# Altium PCB RF315.PcbDoc (part 3 of 3)
Units mm, origin at the board's own origin, x right, y up, seen from the top; angles counter-clockwise.
Board outline 104 x 96 mm, 2 copper layers (Top Layer, Bottom Layer); 249 components, 20 nets, 1048 pads, 153 vias.
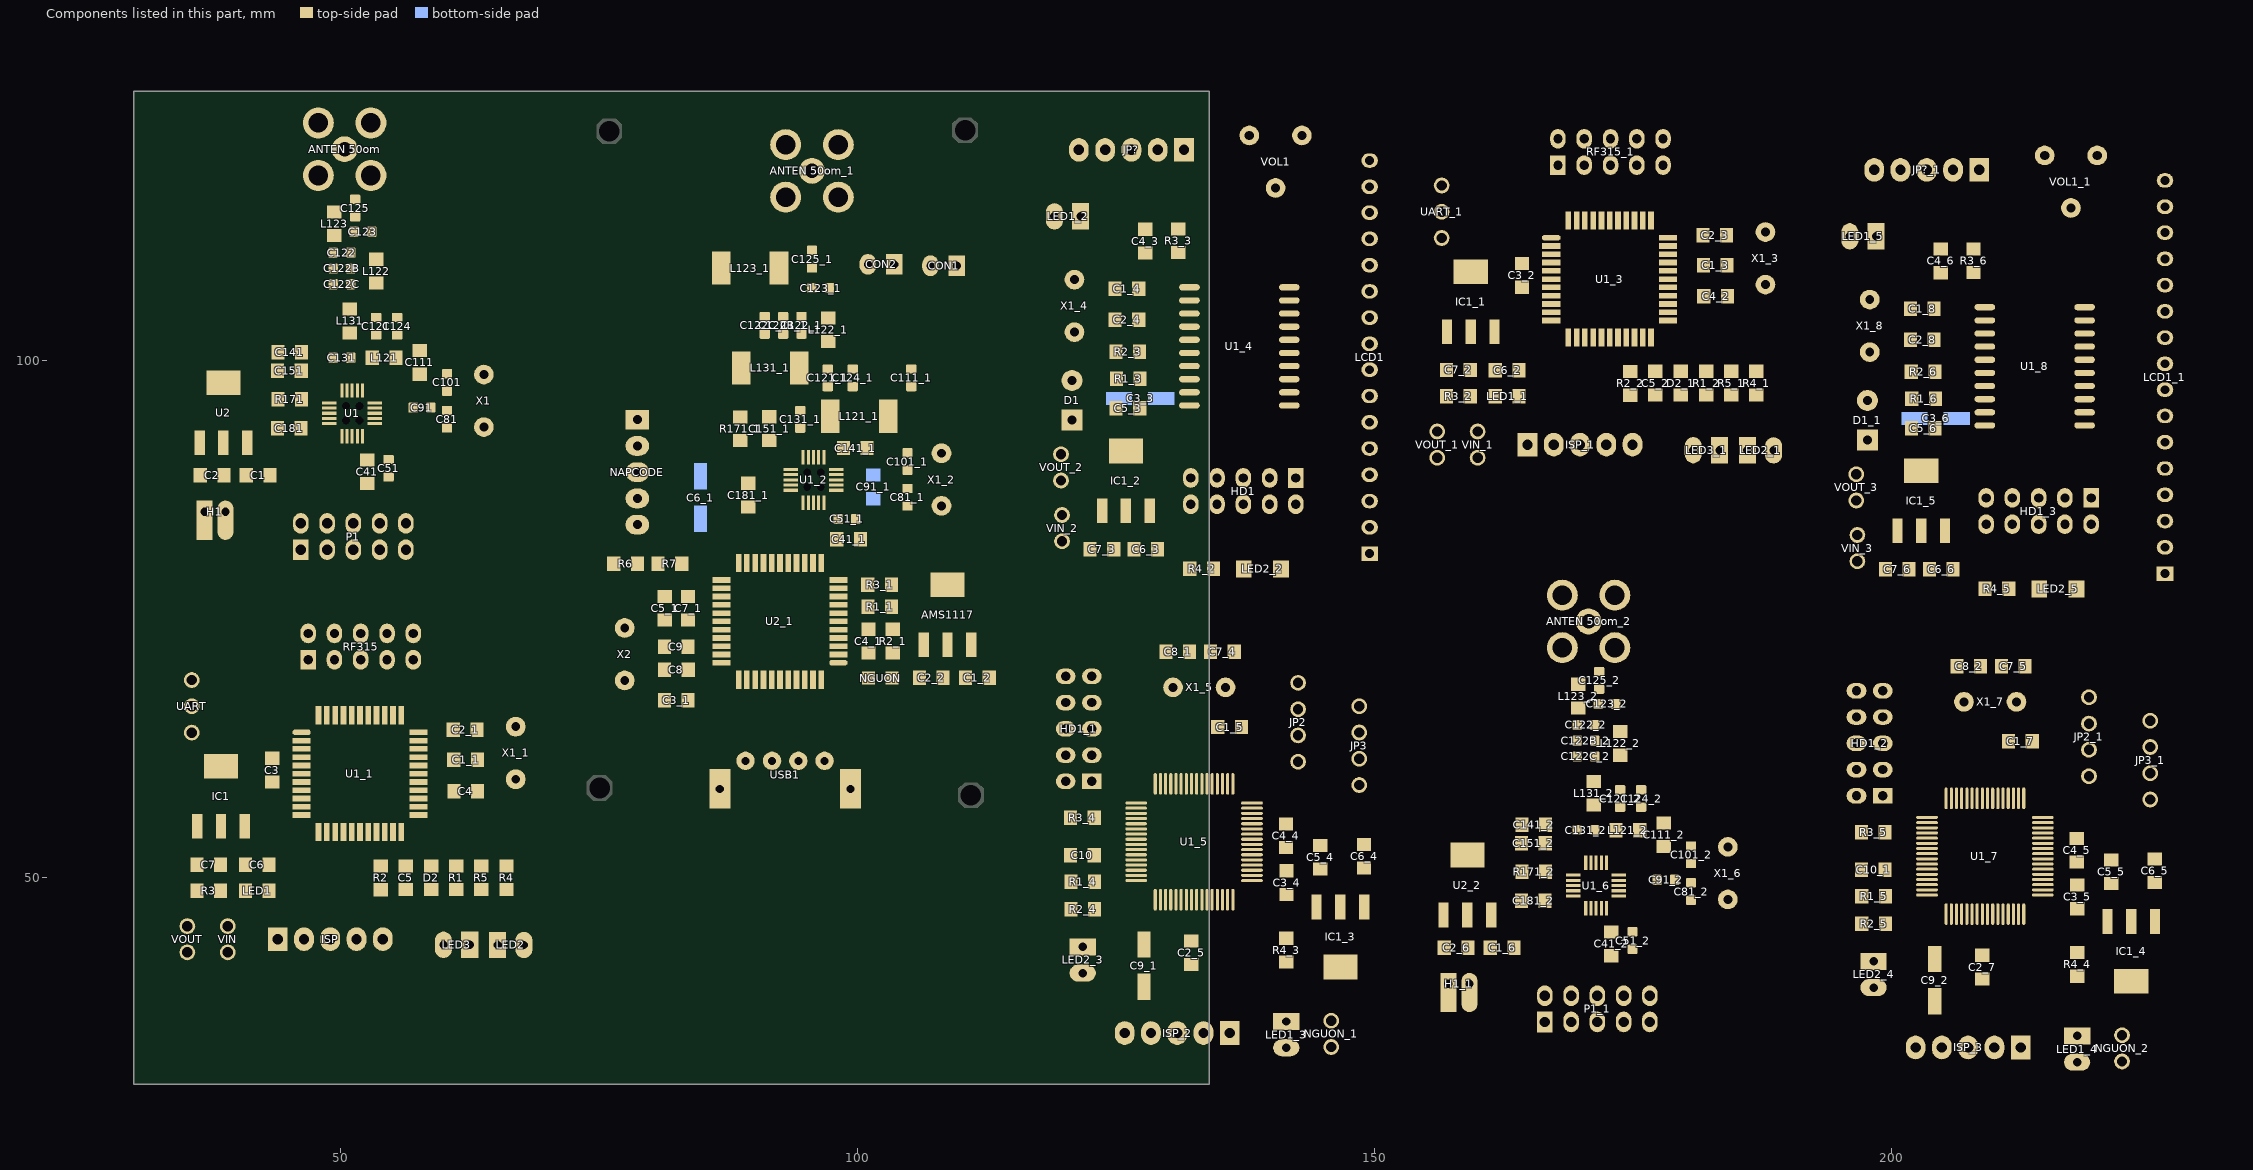
[diagram p3: the components of this part, seen from the top]

## Via types
v1: diameter 1.27, hole 0.711, Top Layer to Bottom Layer, 103 vias
v2: diameter 1.1, hole 0.7, Top Layer to Bottom Layer, 35 vias
v3: diameter 1, hole 0.7, Top Layer to Bottom Layer, 5 vias
v4: diameter 1, hole 0.6, Top Layer to Bottom Layer, 3 vias
v5: diameter 1.2, hole 0.7, Top Layer to Bottom Layer, 2 vias
v6: diameter 1.1, hole 0.711, Top Layer to Bottom Layer, 2 vias
v7: diameter 1, hole 0.711, Top Layer to Bottom Layer, 2 vias
v8: diameter 1.143, hole 0.711, Top Layer to Bottom Layer, 1 vias

## Nets (pads, with @x,y where several pads share a name; then routed paths per layer and width w, separated by ;. In a path a pad name is that pad's centre, name@x,y a point inside that pad or via, vN(x,y) a via of type N, cw(c..) or ccw(c..) an arc to the next point about the centre after c; other vN are vias at no path point) (continued)
copper on no net: (continued)
  Top Layer w0.254: 29.896,127.686 29.895,128.194 ; 31.419,128.451 29.896,127.94 ; 31.421,127.435 29.896,127.94 ; 43.652,98.425 44.199,98.972 ; 43.967,99.203 43.967,100.519 44.199,100.75 44.199,101.678 44.795,102.274 48.351,102.274 ; v1(46.177,93.421) 47.632,94.876 48.913,94.876 ; 46.177,96.215 47.016,95.376 48.913,95.376 ; v7@46.228,98.984 46.228,100.762 ; 48.653,95.876 48.913,95.876 50.174,95.876 50.495,95.555 ; 48.667,65.67 48.667,70.308 49.403,71.044 ; 48.666,84.226 48.666,86.97 50.113,88.416 50.113,92.676 ; 48.743,81.712 47.498,82.956 47.498,93.523 47.851,93.876 48.913,93.876 ; 48.913,94.376 50.378,94.376 50.546,94.209 ; 49.279,100.242 49.279,101.346 49.279,107.354 49.279,108.878 49.279,110.402 48.097,110.402 47.843,110.656 47.843,117.872 47.843,122.952 52.923,122.952 52.923,117.872 53.011,117.784 53.011,112.434 ; v2@49.367,112.053 50.002,112.053 50.979,111.076 50.979,110.402 ; 49.467,65.67 49.467,68.568 51.943,71.044 ; 49.836,113.87 51.399,113.87 51.399,112.522 51.311,112.434 ; 50.113,97.076 50.113,98.046 49.835,98.323 46.863,98.323 v7(46.228,98.958) 50.165,98.958 50.613,98.511 50.613,97.076 ; 50.383,120.412 50.383,116.586 51.399,115.57 ; 50.613,92.676 50.613,87.011 50.038,86.436 50.038,82.804 51.257,81.585 ; v2@50.891,104.941 52.63,104.941 53.431,104.14 v2@53.431,107.481 ; 50.979,100.242 v2@50.979,102.567 ; 50.979,107.354 50.979,108.878 50.979,110.402 ; 51.113,92.676 51.113,84.371 51.232,84.252 ; 51.113,97.076 51.113,100.108 ; 51.613,92.676 51.613,91.262 v1@52.502,90.373 ; 51.613,97.076 51.613,98.678 53.05,100.115 53.05,100.242 53.431,100.623 53.431,102.44 ; v1(51.918,68.402) 52.121,68.402 53.467,67.056 53.467,65.67 ; 51.943,73.584 51.943,74.32 52.984,75.362 54.889,75.362 55.829,74.422 55.829,69.698 55.093,68.961 55.093,65.696 55.067,65.67 ; 52.113,92.676 52.113,91.829 52.451,91.491 54.026,91.491 54.585,90.932 54.585,90.399 ; 52.113,97.076 52.113,98.036 52.781,98.704 57.658,98.704 v1@57.709,98.654 ; 53.313,94.376 54.976,94.376 56.769,92.583 56.769,86.538 55.016,84.785 55.016,82.728 53.975,81.686 53.772,81.686 53.746,81.686 ; 53.313,94.876 55.162,94.876 56.617,93.421 60.274,93.421 ; 53.313,95.376 56.997,95.376 v4@57.023,95.402 ; 53.313,95.876 55.185,95.876 56.083,96.774 58.369,96.774 60.3,98.705 ; 53.315,93.853 53.34,93.878 54.635,93.878 56.083,92.431 56.083,87.452 53.772,85.141 53.772,84.226 ; v2@53.431,109.767 52.796,110.402 50.979,110.402 ; 54.267,65.67 54.267,68.72 53.289,69.698 53.289,72.39 54.483,73.584 ; v2@55.336,100.242 55.463,100.369 55.463,102.44 ; 55.463,104.14 55.883,104.14 57.633,102.39 57.633,100.976 57.241,100.584 ; 60.201,97.093 60.289,97.005 ; 60.289,93.449 63.757,93.449 ; 60.325,98.73 60.3,98.705 ; 63.845,98.617 63.757,98.705 60.3,98.705 ; v1(75.438,62.586) 78.232,65.38 89.992,65.38 91.681,67.069 91.681,69.127 ; 77.47,74.117 77.927,74.117 ; v1(77.927,62.56) 80.137,64.77 90.5,64.77 92.481,66.751 92.481,69.127 ; 78.689,80.315 80.696,80.315 ; v1(80.442,62.56) 81.991,64.11 90.703,64.11 93.294,66.7 93.294,68.758 93.281,68.771 93.281,69.127 ; 81.305,72.288 81.305,70.104 81.331,70.079 ; v1(82.55,62.56) 83.439,63.449 91.135,63.449 94.081,66.395 94.081,69.127 ; v1@86.786,108.915 86.786,105.975 88.621,104.14 90.92,104.14 91.008,104.228 92.786,104.228 94.564,104.228 97.016,104.228 97.155,104.089 ; 86.856,77.952 94.412,77.952 v3(94.488,77.876) ; 88.646,94.513 88.671,94.539 91.465,94.539 ; v1@88.742,99.263 88.742,98.914 90.83,96.825 92.747,96.825 94.437,95.135 95.726,93.846 95.726,90.636 ; 89.154,92.177 89.154,91.897 92.115,88.936 93.526,88.936 ; 91.008,102.528 92.786,102.528 94.564,102.528 ; v1@91.846,71.857 91.491,71.857 91.567,71.78 v1(91.923,71.78) 92.959,70.744 98.106,70.744 ; v3(91.948,85.496) 91.948,87.02 92.364,87.436 93.526,87.436 ; v1@92.386,108.915 92.399,108.929 95.58,108.929 95.568,108.917 95.568,106.985 ; 93.04,115.771 93.04,120.851 98.12,120.851 98.12,115.771 100.99,112.901 100.99,109.271 100.99,107.925 100.076,107.01 97.294,107.01 97.268,106.985 ; 93.526,87.936 94.926,87.936 ; 93.526,89.436 94.826,89.436 95.126,89.136 ; v3(93.548,84.531) 93.878,84.531 94.726,85.379 94.726,86.236 ; 94.081,80.377 94.158,80.454 94.158,83.363 95.226,84.431 95.226,86.236 ; v1@94.342,99.263 96.989,99.263 97.104,99.148 97.155,99.199 97.155,101.803 ; 94.881,80.377 94.881,82.283 v3(95.453,82.855) ; 95.58,110.629 95.58,118.311 ; 95.726,86.236 95.726,84.36 96.481,83.605 96.481,80.377 ; 96.226,90.636 96.226,93.463 97.352,94.59 97.352,97.2 97.104,97.448 ; 96.726,86.236 96.726,85.062 97.13,84.658 98.108,84.658 ; 97.926,87.436 99.965,87.436 101.702,85.7 101.702,81.051 99.402,78.752 98.106,78.752 ; 97.926,87.936 100.125,87.936 102.743,85.319 v1(102.743,80.493) ; 97.926,88.436 100.438,88.436 102.972,85.903 104.805,85.903 104.808,85.906 104.831,85.928 108.102,85.928 ; 97.926,89.436 99.74,89.436 100.542,90.238 103.986,90.238 104.808,91.06 108.05,91.06 108.102,91.008 ; v1(98.842,80.438) 100.254,81.85 100.254,82.677 100.254,84.213 99.808,84.658 ; 99.517,97.448 102.12,97.448 102.921,96.647 102.921,94.621 v1@102.952,94.59 ; 99.517,99.148 105.181,99.148 ; 99.542,72.138 99.976,71.704 101.041,71.704 ; 100.609,77.952 100.965,78.308 ; 103.327,69.266 103.403,69.342 ; 104.808,87.606 104.808,89.36 ; 105.969,69.291 105.969,64.567 106.578,63.957 109.55,63.957 110.439,64.846 110.439,69.317 ; 120.105,61.818 121.298,60.624 124.256,60.624 124.778,60.102 124.778,57.881 125.473,57.186 126.925,57.186 ; 120.105,64.358 121.324,63.139 128.791,63.139 130.275,61.655 130.275,59.036 ; 120.105,66.898 121.349,65.654 128.715,65.654 131.275,63.094 131.275,59.036 ; 120.105,69.438 122.645,69.438 ; 120.587,52.115 120.587,49.601 120.613,49.575 120.613,46.908 ; 120.587,55.748 119.546,55.748 117.869,54.071 117.869,44.445 119.012,43.302 121.73,43.302 121.756,43.276 ; 121.389,128.16 29.896,127.94 ; 122.645,61.818 128.766,61.818 129.775,60.809 129.775,59.036 ; 122.645,64.358 128.715,64.358 130.773,62.301 130.773,59.039 130.775,59.036 ; 122.645,66.898 129.096,66.898 131.775,64.219 131.775,59.036 ; 122.873,55.748 124.435,54.186 126.925,54.186 ; v5(122.899,46.908) 124.194,45.613 131.179,45.613 131.775,46.209 131.775,47.836 ; v1(122.899,49.575) 123.483,49.575 124.423,50.515 124.423,52.547 125.062,53.186 126.925,53.186 ; 126.925,53.686 119.516,53.686 118.454,52.623 118.454,46.223 119.749,44.927 122.899,44.927 127.674,40.152 127.674,39.415 ; 130.493,68.371 132.775,68.371 ; 130.9,34.945 130.9,40.203 132.271,41.574 ; v1(131.001,51.404) 132.775,49.63 132.775,47.836 ; v1(131.001,55.214) 132.275,56.488 132.275,59.036 132.275,60.671 ; 132.08,95.631 134.188,95.631 136.068,93.751 136.068,87.3 137.287,86.081 ; 132.08,96.901 134.366,96.901 v1(135.458,97.993) ; 132.08,98.171 130.581,98.171 129.946,97.536 129.946,92.71 131.318,91.338 133.426,91.338 134.874,89.891 134.874,88.748 134.747,88.621 ; 132.093,71.826 132.775,71.144 132.775,68.371 ; 132.271,43.86 133.275,44.864 133.275,47.836 ; v1(132.525,38.704) 133.775,39.954 133.775,47.836 ; 132.775,59.036 132.775,68.371 ; 133.275,59.036 133.275,68.346 ; 133.44,34.945 134.275,35.781 134.275,47.836 ; 133.775,59.036 133.775,62.128 134.786,63.139 136.107,63.139 137.097,64.13 137.097,64.536 ; 134.125,71.8 133.275,70.95 133.275,68.346 ; 134.275,59.036 134.275,61.638 135.014,62.377 141.237,62.377 142.584,63.723 ; v1(134.684,55.341) 134.684,54.452 135.45,53.686 138.125,53.686 140.606,53.686 141.415,52.877 ; 134.747,86.081 134.747,85.928 136.068,84.607 143.18,84.607 144.247,85.674 144.247,96.215 143.561,96.901 141.732,96.901 ; 134.775,59.036 134.775,60.665 135.421,61.31 142.457,61.31 142.584,61.183 ; v1(134.811,51.404) 135.029,51.186 138.125,51.186 ; 135.573,68.371 133.301,68.371 133.275,68.346 ; 136.081,35.377 136.157,35.301 ; 137.287,88.621 137.338,88.671 137.338,96.774 138.735,98.171 141.732,98.171 ; 138.125,50.686 141.422,50.686 141.466,50.642 ; 138.125,54.186 140.438,54.186 141.415,55.163 ; 138.125,56.686 149.009,56.686 149.797,57.475 149.797,60.167 148.502,61.463 ; 138.125,57.186 146.765,57.186 148.502,58.923 ; 138.961,128.202 230.454,128.422 ; 139.827,86.081 138.506,87.401 138.506,94.437 139.7,95.631 141.732,95.631 ; 139.827,88.621 v1(139.827,93.167) ; 140.411,116.662 141.478,115.595 150.495,115.595 151.232,114.859 151.232,87.706 149.911,86.385 149.504,86.385 ; 163.946,52.756 164.493,53.303 ; 164.262,53.534 164.262,54.85 164.493,55.081 164.493,56.009 165.089,56.605 168.645,56.605 ; v1(166.472,47.752) 167.927,49.207 169.207,49.207 ; 166.472,50.546 167.311,49.707 169.207,49.707 ; v7@166.522,53.315 166.522,55.093 ; 168.947,50.207 169.207,50.207 170.468,50.207 170.79,49.886 ; 168.961,38.557 168.961,41.3 170.407,42.747 170.407,47.007 ; 169.037,36.043 167.792,37.287 167.792,47.854 168.146,48.207 169.207,48.207 ; 169.207,48.707 170.673,48.707 170.84,48.539 ; 169.52,113.498 169.52,118.136 170.256,118.872 ; 169.573,54.573 169.573,55.677 169.573,61.685 169.573,63.209 169.573,64.733 168.391,64.733 168.137,64.987 168.137,72.203 168.137,77.283 173.217,77.283 173.217,72.203 173.305,72.115 173.305,66.765 ; v2@169.661,66.384 170.296,66.384 171.273,65.407 171.273,64.733 ; 170.13,68.201 171.693,68.201 171.693,66.853 171.605,66.765 ; 170.32,113.498 170.32,116.396 172.796,118.872 ; 170.407,51.407 170.407,52.376 170.129,52.654 167.157,52.654 v7(166.522,53.289) 170.459,53.289 170.907,52.842 170.907,51.407 ; 170.677,74.743 170.677,70.917 171.693,69.901 ; 170.907,47.007 170.907,41.342 170.332,40.767 170.332,37.135 171.552,35.916 ; v2@171.185,59.272 172.924,59.272 173.725,58.471 v2@173.725,61.812 ; 171.273,54.573 v2@171.273,56.898 ; 171.273,61.685 171.273,63.209 171.273,64.733 ; 171.407,47.007 171.407,38.702 171.526,38.583 ; 171.407,51.407 171.407,54.439 ; 171.907,47.007 171.907,45.593 v1@172.796,44.704 ; 171.907,51.407 171.907,53.009 173.344,54.446 173.344,54.573 173.725,54.954 173.725,56.771 ; 172.407,47.007 172.407,46.16 172.745,45.822 174.32,45.822 174.879,45.263 174.879,44.729 ; 172.407,51.407 172.407,52.367 173.076,53.035 177.952,53.035 v1@178.003,52.984 ; v1(172.771,116.23) 172.974,116.23 174.32,114.884 174.32,113.498 ; 172.796,121.412 172.796,122.149 173.838,123.19 175.743,123.19 176.682,122.25 176.682,117.526 175.946,116.789 175.946,113.524 175.92,113.498 ; 173.607,48.707 175.27,48.707 177.063,46.914 177.063,40.869 175.311,39.116 175.311,37.059 174.269,36.017 174.066,36.017 174.041,36.017 ; 173.607,49.207 175.456,49.207 176.911,47.752 180.569,47.752 ; 173.607,49.707 177.291,49.707 v4@177.317,49.733 ; 173.607,50.207 175.48,50.207 176.378,51.105 178.664,51.105 180.594,53.035 ; 173.609,48.184 173.634,48.209 174.93,48.209 176.378,46.761 176.378,41.783 174.066,39.472 174.066,38.557 ; v2@173.725,64.098 173.09,64.733 171.273,64.733 ; 175.12,113.498 175.12,116.548 174.142,117.526 174.142,120.218 175.336,121.412 ; v2@175.63,54.573 175.757,54.7 175.757,56.771 ; 175.757,58.471 176.177,58.471 177.927,56.721 177.927,55.307 177.535,54.915 ; 180.495,51.423 180.583,51.335 ; 180.583,47.779 184.051,47.779 ; 180.619,53.061 180.594,53.035 ; 184.139,52.947 184.051,53.035 180.594,53.035 ; 196.584,60.421 197.778,59.227 200.735,59.227 201.258,58.705 201.258,56.484 201.953,55.789 203.405,55.789 ; 196.584,62.961 197.803,61.742 205.271,61.742 206.755,60.258 206.755,57.639 ; 196.584,65.501 197.829,64.257 205.195,64.257 207.755,61.697 207.755,57.639 ; 196.584,68.041 199.124,68.041 ; 197.067,50.718 197.067,48.204 197.092,48.178 197.092,45.511 ; 197.067,54.351 196.025,54.351 194.349,52.674 194.349,43.048 195.492,41.905 198.21,41.905 198.235,41.879 ; 199.124,60.421 205.245,60.421 206.255,59.412 206.255,57.639 ; 199.124,62.961 205.195,62.961 207.252,60.904 207.252,57.642 207.255,57.639 ; 199.124,65.501 205.576,65.501 208.255,62.822 208.255,57.639 ; 199.353,54.351 200.914,52.789 203.405,52.789 ; v5(199.378,45.511) 200.673,44.216 207.658,44.216 208.255,44.812 208.255,46.439 ; v1(199.378,48.178) 199.962,48.178 200.902,49.118 200.902,51.15 201.541,51.789 203.405,51.789 ; 203.405,52.289 195.996,52.289 194.933,51.226 194.933,44.826 196.228,43.53 199.378,43.53 204.153,38.755 204.153,38.018 ; 206.973,66.974 209.255,66.974 ; 207.379,33.548 207.379,38.806 208.751,40.177 ; v1(207.481,50.007) 209.255,48.233 209.255,46.439 ; v1(207.481,53.817) 208.755,55.091 208.755,57.639 208.755,59.274 ; 208.573,70.429 209.255,69.747 209.255,66.974 ; 208.751,42.463 209.755,43.467 209.755,46.439 ; 208.991,93.701 211.099,93.701 212.979,91.821 212.979,85.369 214.198,84.15 ; 208.991,94.971 211.277,94.971 v1(212.369,96.063) ; 208.991,96.241 207.493,96.241 206.858,95.606 206.858,90.78 208.229,89.408 210.337,89.408 211.785,87.96 211.785,86.817 211.658,86.69 ; v1(209.005,37.307) 210.255,38.557 210.255,46.439 ; 209.255,57.639 209.255,66.974 ; 209.755,57.639 209.755,66.949 ; 209.919,33.548 210.755,34.384 210.755,46.439 ; 210.255,57.639 210.255,60.731 211.265,61.742 212.586,61.742 213.577,62.733 213.577,63.139 ; 210.605,70.403 209.755,69.553 209.755,66.949 ; 210.755,57.639 210.755,60.241 211.494,60.98 217.717,60.98 219.063,62.326 ; v1(211.164,53.944) 211.164,53.055 211.93,52.289 214.605,52.289 217.086,52.289 217.895,51.48 ; 211.255,57.639 211.255,59.268 211.9,59.913 218.936,59.913 219.063,59.786 ; v1(211.291,50.007) 211.509,49.789 214.605,49.789 ; 211.658,84.15 211.658,83.998 212.979,82.677 220.091,82.677 221.158,83.744 221.158,94.285 220.472,94.971 218.643,94.971 ; 212.053,66.974 209.78,66.974 209.755,66.949 ; 212.561,33.98 212.637,33.904 ; 214.198,86.69 214.249,86.741 214.249,94.844 215.646,96.241 218.643,96.241 ; 214.605,49.289 217.901,49.289 217.945,49.245 ; 214.605,52.789 216.917,52.789 217.895,53.766 ; 214.605,55.289 225.488,55.289 226.277,56.078 226.277,58.77 224.981,60.066 ; 214.605,55.789 223.245,55.789 224.981,57.526 ; 216.738,84.15 215.417,85.471 215.417,92.507 216.611,93.701 218.643,93.701 ; 216.738,86.69 v1(216.738,91.237) ; 217.322,114.732 218.389,113.665 227.406,113.665 228.143,112.928 228.143,85.776 226.822,84.455 226.416,84.455 ; 228.929,128.927 230.454,128.422 ; 228.931,127.911 230.454,128.422 ; 230.455,128.168 230.454,128.676
  Top Layer w0.305: v2(89.383,88.113) 89.408,88.113 89.732,88.436 93.526,88.436 ; 94.726,90.636 92.144,90.636 91.465,91.315 v8(91.465,92.253) 94.691,92.253 95.226,91.718 95.226,90.636 ; 96.226,86.236 96.226,84.673 97.968,82.931 v2(97.968,82.677) ; 96.726,90.636 96.726,91.468 97.13,91.872 98.196,91.872 v3(98.577,91.491) ; 97.926,88.936 101.433,88.936 v2(101.473,88.976)
  Top Layer w0.508: 35.611,63.997 35.634,64.02 46.217,64.02 ; 35.611,66.537 35.981,66.167 47.867,66.167 47.867,65.67 ; 38.379,48.692 40.792,48.692 ; 43.383,61.519 43.713,61.519 45.212,60.02 46.217,60.02 48.463,60.02 v1(49.682,61.239) ; 43.396,59.22 46.217,59.22 ; 43.917,44.018 43.917,45.161 51.067,52.311 51.067,54.37 ; 46.457,44.018 46.457,46.05 51.867,51.46 51.867,54.37 ; 52.667,54.37 52.667,52.286 53.873,51.079 52.299,49.505 52.299,45.796 54.077,44.018 ; v1(53.035,61.163) 53.378,60.82 57.517,60.82 ; 53.873,48.793 53.975,48.793 56.286,51.105 58.572,48.819 58.75,48.819 61.189,48.819 ; v1(54.508,56.794) 54.534,56.82 57.517,56.82 ; 55.867,54.37 55.867,53.175 56.54,52.502 62.205,52.502 63.602,51.105 ; 57.517,56.02 64.731,56.02 66.091,54.661 66.091,51.156 66.04,51.105 ; 57.517,60.02 59.284,60.02 v1(60.96,58.344) ; 57.517,61.62 60.681,61.62 60.935,61.366 60.935,60.579 61.976,59.538 62.388,59.538 62.401,59.55 66.865,59.55 66.929,59.487 ; 57.517,62.42 59.042,62.42 60.884,64.262 60.884,64.567 61.925,65.608 65.888,65.608 66.929,64.567 ; 62.484,43.477 62.382,43.579 62.382,47.168 63.602,48.387 63.602,48.819 ; 65.176,43.459 65.176,47.955 66.04,48.819 ; v1(74.168,66.142) 74.168,78.08 76.403,80.315 ; 77.47,69.037 77.927,68.58 82.702,68.58 83.617,69.494 83.617,70.079 84.29,70.752 86.856,70.752 ; 77.47,74.117 77.978,73.609 82.88,73.609 83.591,72.898 83.591,72.288 84.328,71.552 86.856,71.552 ; 78.689,84.099 79.197,84.099 82.982,80.315 84.709,82.042 90.881,82.042 91.681,81.242 91.681,80.377 ; 78.689,91.719 79.197,91.719 81.559,89.357 81.559,84.847 83.51,82.896 91.551,82.896 92.481,81.966 92.481,80.377 ; 78.689,94.259 79.172,94.259 82.931,90.5 82.931,85.725 84.582,84.074 91.973,84.074 93.281,82.766 93.281,80.377 ; 79.07,86.639 78.689,86.639 78.614,86.639 76.403,84.429 76.403,80.315 ; 81.356,74.879 83.591,74.879 85.318,73.152 86.856,73.152 90.017,73.152 v1(90.068,73.101) 89.319,72.352 86.856,72.352 ; 83.591,67.107 90.145,67.107 90.881,67.844 90.881,69.127 ; v4(84.557,78.943) 84.748,78.752 86.856,78.752 ; 86.856,73.952 86.856,74.752 85.933,74.752 cw(c85.933,75.729) 85.242,75.038 85.242,76.838 ccw(c84.453,76.049) 84.453,77.165 83.591,77.165 83.591,77.749 82.55,78.791 77.802,78.791 76.403,80.19 76.403,80.315 ; 94.259,61.265 94.881,61.887 94.881,69.127 ; 94.926,87.936 95.126,87.736 ; v1(94.945,76.022) 96.215,74.752 98.106,74.752 99.028,74.752 99.542,74.238 99.542,72.138 ; 95.681,69.127 95.681,65.812 v1(96.85,64.643) ; 96.481,69.127 96.481,67.831 v1(99.593,64.719) ; 98.106,76.352 98.106,75.552 99.479,75.552 101.041,73.99 103.403,73.99 104.826,73.99 108.687,77.851 v1(108.687,78.287) ; 98.106,77.152 99.987,77.152 100.99,76.149 ; 98.106,77.952 100.609,77.952 ; 101.041,69.266 101.041,71.704 ; 103.251,78.308 110.414,85.471 110.414,102.387 103.53,109.271 ; 103.276,76.149 103.454,76.149 105.918,78.613 105.918,79.527 111.608,85.217 111.608,107.112 109.576,109.144 ; 103.403,69.342 103.403,71.704 ; v1(105.054,94.412) 105.181,94.539 105.181,97.448 ; v1(108.179,66.192) 108.255,66.269 108.255,69.291 108.687,69.723 108.687,72.487 ; 120.726,98.044 120.879,98.196 125.019,98.196 ; 120.955,102.718 121.133,102.54 126.289,102.54 127.178,103.429 127.178,103.937 127.762,104.521 132.08,104.521 ; 120.955,107.798 121.31,108.153 126.213,108.153 127.178,107.188 127.178,106.934 128.321,105.791 132.08,105.791 ; 121.564,113.919 121.793,114.148 129.946,114.148 130.988,113.106 130.988,112.7 ; v1(124.765,81.712) 126.695,81.712 126.721,81.737 ; 124.968,100.813 124.968,98.247 125.019,98.196 ; 124.993,95.377 125.019,95.402 125.019,98.196 ; v2@127.254,100.813 129.692,103.251 132.08,103.251 ; v1@129.642,99.339 v1(129.743,99.441) 132.08,99.441 ; 131.547,120.345 131.547,116.205 133.553,114.198 149.426,114.198 149.504,114.276 ; 132.08,100.711 134.391,100.711 135.966,102.286 135.966,107.467 137.695,109.196 149.504,109.196 ; 132.08,101.981 133.96,101.981 134.798,102.819 134.798,109.677 136.857,111.736 149.504,111.736 ; 134.391,79.832 137.338,79.832 ; v1(138.405,101.981) 139.675,103.251 141.732,103.251 ; 141.441,36.063 141.441,41.828 ; 141.732,99.441 144.297,99.441 149.504,94.234 149.504,94.005 ; 141.732,100.711 v2(146.456,100.711) ; 141.732,101.981 v2(144.45,101.981) ; 141.732,104.521 146.253,104.521 v2(146.329,104.597) ; 141.732,105.791 v2(144.348,105.791) ; 148.375,64.13 148.502,64.003 ; 156.464,111.825 156.487,111.848 167.07,111.848 ; 156.464,114.365 156.834,113.995 168.72,113.995 168.72,113.498 ; 159.233,96.52 161.646,96.52 ; 164.236,109.347 164.567,109.347 166.065,107.848 167.07,107.848 169.316,107.848 v1(170.536,109.068) ; 164.249,107.048 167.07,107.048 ; 164.77,91.846 164.77,92.989 171.92,100.14 171.92,102.198 ; 167.31,91.846 167.31,93.878 172.72,99.289 172.72,102.198 ; 173.52,102.198 173.52,100.114 174.727,98.908 173.152,97.333 173.152,93.624 174.93,91.846 ; v1(173.888,108.991) 174.231,108.648 178.37,108.648 ; 174.727,96.622 174.828,96.622 177.14,98.933 179.426,96.647 179.603,96.647 182.042,96.647 ; v1(175.362,104.623) 175.387,104.648 178.37,104.648 ; 176.72,102.198 176.72,101.004 177.394,100.33 183.058,100.33 184.455,98.933 ; 178.37,103.848 185.585,103.848 186.944,102.489 186.944,98.984 186.893,98.933 ; 178.37,107.848 180.137,107.848 v1(181.813,106.172) ; 178.37,109.448 181.534,109.448 181.788,109.195 181.788,108.407 182.829,107.366 183.241,107.366 183.254,107.379 187.719,107.379 187.782,107.315 ; 178.37,110.248 179.895,110.248 181.737,112.09 181.737,112.395 182.778,113.436 186.741,113.436 187.782,112.395 ; 183.337,91.305 183.236,91.407 183.236,94.996 184.455,96.215 184.455,96.647 ; 186.03,91.288 186.03,95.783 186.893,96.647 ; 197.637,96.114 197.79,96.266 201.93,96.266 ; 197.866,100.787 198.044,100.609 203.2,100.609 204.089,101.498 204.089,102.006 204.673,102.591 208.991,102.591 ; 197.866,105.867 198.222,106.223 203.124,106.223 204.089,105.258 204.089,105.004 205.232,103.861 208.991,103.861 ; 198.476,111.989 198.704,112.217 206.858,112.217 207.899,111.176 207.899,110.769 ; v1(201.676,79.781) 203.606,79.781 203.632,79.807 ; 201.879,98.882 201.879,96.317 201.93,96.266 ; 201.905,93.447 201.93,93.472 201.93,96.266 ; v2@204.165,98.882 206.604,101.321 208.991,101.321 ; v1@206.553,97.409 v1(206.654,97.511) 208.991,97.511 ; 208.458,118.415 208.458,114.275 210.464,112.268 226.338,112.268 226.416,112.346 ; 208.991,98.781 211.303,98.781 212.877,100.355 212.877,105.537 214.606,107.266 226.416,107.266 ; 208.991,100.051 210.871,100.051 211.709,100.889 211.709,107.747 213.768,109.806 226.416,109.806 ; 211.303,77.902 214.249,77.902 ; v1(215.316,100.051) 216.586,101.321 218.643,101.321 ; 217.92,34.666 217.92,40.431 ; 218.643,97.511 221.209,97.511 226.416,92.304 226.416,92.075 ; 218.643,98.781 v2(223.368,98.781) ; 218.643,100.051 v2(221.361,100.051) ; 218.643,102.591 223.164,102.591 v2(223.241,102.667) ; 218.643,103.861 v2(221.259,103.861) ; 224.854,62.733 224.981,62.606
  Top Layer w0.635: 119.659,90.911 119.989,91.241 v1(125.933,91.241) 125.933,85.441 125.933,84.049 125.12,83.236 123.139,83.236 122.479,82.575 122.479,81.712 ; 122.645,59.278 122.645,58.669 121.527,57.551 118.657,57.551 116.98,55.875 v2(116.98,47.975) 116.98,34.818 119.063,32.735 126.15,32.735 128.36,34.945 ; 128.461,34.843 128.36,34.945 ; 132.271,43.86 131.433,43.86 129.757,42.184 129.757,36.342 128.36,34.945 ; 141.415,55.163 143.117,55.163 ; 141.466,50.642 141.974,50.642 143.117,51.785 143.117,55.163 ; v1(146.673,41.341) 146.673,47.141 146.673,48.077 ; 148.375,66.67 148.502,66.543 ; 148.959,50.363 148.959,50.896 148.197,50.896 146.775,52.319 146.775,53.868 145.479,55.163 143.117,55.163 ; 196.571,88.981 196.901,89.311 v1(202.844,89.311) 202.844,83.511 202.844,82.118 202.032,81.305 200.05,81.305 199.39,80.645 199.39,79.781 ; 199.124,57.881 199.124,57.272 198.006,56.154 195.136,56.154 193.46,54.478 v2(193.46,46.578) 193.46,33.421 195.543,31.338 202.629,31.338 204.839,33.548 ; 204.941,33.446 204.839,33.548 ; 208.751,42.463 207.912,42.463 206.236,40.787 206.236,34.945 204.839,33.548 ; 217.895,53.766 219.596,53.766 ; 217.945,49.245 218.453,49.245 219.596,50.388 219.596,53.766 ; v1(223.152,39.944) 223.152,45.744 223.152,46.68 ; 224.854,65.273 224.981,65.146 ; 225.438,48.966 225.438,49.499 224.676,49.499 223.254,50.922 223.254,52.471 221.959,53.766 219.596,53.766
  Top Layer w0.762: 35.179,42.744 33.68,44.242 33.68,47.041 35.331,48.692 36.093,48.692 36.093,48.946 38.379,51.232 38.43,51.283 v6(38.43,54.936) ; v1(38.43,60.736) 39.933,59.233 43.383,59.233 43.396,59.22 ; v1@38.557,97.815 38.659,97.714 38.659,92.02 v1@38.659,88.824 ; 120.726,94.234 117.297,94.234 v1(117.246,94.285) ; 123.927,120.345 123.927,118.643 122.86,117.577 119.151,117.577 117.272,115.697 v1@117.272,111.201 ; 127.305,98.196 127.686,98.196 129.032,96.85 129.032,87.249 128.233,86.45 128.233,85.441 128.233,82.434 v2@129.007,81.661 ; 128.461,34.843 128.461,32.913 130.366,31.008 147.029,31.008 148.553,32.532 148.553,39.462 v1(146.673,41.341) 147.481,41.341 ; 132.08,107.061 129.464,107.061 127.813,108.712 127.813,110.388 126.949,111.252 v1(117.323,111.252) v1@117.272,111.201 ; 132.105,79.832 130.835,79.832 v2@129.007,81.661 ; 137.097,64.536 139.256,66.695 139.256,71.013 140.475,72.232 v1(142.482,72.232) ; 142.584,68.803 142.482,68.905 v1(142.482,72.232) ; 142.951,121.742 142.951,119.355 145.529,116.776 149.504,116.776 ; 144.373,47.141 144.373,50.425 144.743,50.795 ; 146.673,48.077 148.959,50.363 ; 148.502,66.543 151.296,66.543 v1(151.347,66.492) ; 148.959,50.896 149.619,50.896 151.347,52.623 v1(151.347,66.492) ; 149.504,83.845 131.115,83.845 v2(129.007,81.737) v2@129.007,81.661 ; 156.032,90.572 154.534,92.07 154.534,94.869 156.185,96.52 156.947,96.52 156.947,96.774 159.233,99.06 159.283,99.111 v6(159.283,102.764) ; v1@158.852,52.146 158.953,52.045 158.953,46.351 v1@158.953,43.155 ; v1(159.283,108.564) 160.786,107.061 164.236,107.061 164.249,107.048 ; 197.637,92.304 194.208,92.304 v1(194.158,92.354) ; 200.838,118.415 200.838,116.713 199.771,115.646 196.063,115.646 194.183,113.767 v1@194.183,109.271 ; 204.216,96.266 204.597,96.266 205.943,94.92 205.943,85.319 205.144,84.52 205.144,83.511 205.144,80.504 v2@205.918,79.731 ; 204.941,33.446 204.941,31.516 206.846,29.611 223.508,29.611 225.032,31.135 225.032,38.065 v1(223.152,39.944) 223.961,39.944 ; 208.991,105.131 206.375,105.131 204.724,106.782 204.724,108.458 203.86,109.322 v1(194.234,109.322) v1@194.183,109.271 ; 209.017,77.902 207.747,77.902 v2@205.918,79.731 ; 213.577,63.139 215.736,65.298 215.736,69.616 216.955,70.835 v1(218.961,70.835) ; 219.063,67.406 218.961,67.508 v1(218.961,70.835) ; 219.862,119.812 219.862,117.424 222.441,114.846 226.416,114.846 ; 220.852,45.744 220.852,49.028 221.222,49.398 ; 223.152,46.68 225.438,48.966 ; 224.981,65.146 227.775,65.146 v1(227.826,65.095) ; 225.438,49.499 226.099,49.499 227.826,51.226 v1(227.826,65.095) ; 226.416,81.915 208.026,81.915 v2(205.918,79.807) v2@205.918,79.731 ; v1(117.246,94.285) 117.246,111.176 v1@117.272,111.201 ; v1(117.246,94.285) 117.246,87.549 119.761,85.035 117.831,83.104 117.831,81.026 118.872,79.985 127.33,79.985 v2@129.007,81.661 ; v1(142.482,72.232) 149.061,72.232 151.347,69.946 v1(151.347,66.492) ; v1(194.158,92.354) 194.158,109.245 v1@194.183,109.271 ; v1(194.158,92.354) 194.158,85.619 196.672,83.104 194.742,81.174 194.742,79.096 195.783,78.054 204.241,78.054 v2@205.918,79.731 ; v1(218.961,70.835) 225.54,70.835 227.826,68.549 v1(227.826,65.095)
  Top Layer w0.889: 141.441,44.114 141.441,45.334 142.939,46.832 144.064,46.832 144.362,47.13 ; 142.101,44.14 143.625,42.616 143.625,38.293 145.784,36.134 ; 217.92,42.717 217.92,43.937 219.419,45.435 220.543,45.435 220.841,45.733 ; 218.58,42.743 220.104,41.219 220.104,36.896 222.263,34.737
  Top Layer w1.016: 38.811,85.369 40.869,87.427 40.869,88.875 ; 40.73,54.936 40.73,51.269 v1(40.792,51.206) ; 40.869,88.9 40.959,88.99 40.959,92.02 ; 96.799,61.265 97.409,61.874 109.677,61.874 112.725,64.922 112.725,69.317 112.725,70.104 110.987,71.843 110.987,72.487 ; 159.106,39.7 161.163,41.758 161.163,43.205 ; 161.163,43.231 161.253,43.321 161.253,46.351 ; 161.583,102.764 161.583,99.097 v1(161.646,99.035)
  Bottom Layer w0.254: 49.403,73.584 49.403,73.508 50.698,72.212 50.698,69.621 v1(51.918,68.402) ; v4(56.972,95.453) 57.607,96.088 v1@57.607,98.704 ; 80.721,80.289 80.721,77.775 81.356,77.14 ; 84.379,89.179 84.785,88.773 ; v4(84.557,78.943) 84.785,79.172 84.785,84.684 ; 91.719,61.265 91.719,63.144 93.218,64.643 v1(96.85,64.643) ; v1(91.923,71.78) v3@91.923,85.471 ; v3(93.548,84.531) 95.225,82.855 v3(95.453,82.855) ; v3(94.488,77.876) 100.127,77.876 v1(102.743,80.493) ; v5(122.899,46.908) 124.092,45.715 124.092,36.164 125.312,34.945 125.82,34.945 ; v1(132.525,38.704) 134.938,38.704 135.98,37.663 135.98,34.945 ; v1(135.458,97.993) 139.827,93.624 v1(139.827,93.167) ; 170.256,121.412 170.256,121.336 171.552,120.04 171.552,117.45 v1(172.771,116.23) ; v4(177.267,49.784) 177.902,50.419 v1@177.902,53.035 ; v5(199.378,45.511) 200.572,44.318 200.572,34.767 201.791,33.548 202.299,33.548 ; v1(209.005,37.307) 211.418,37.307 212.459,36.266 212.459,33.548 ; v1(212.369,96.063) 216.738,91.694 v1(216.738,91.237)
  Bottom Layer w0.508: 54.483,71.044 54.483,56.82 v1(54.508,56.794) ; v1(74.168,66.142) 74.193,66.116 108.102,66.116 v1(108.179,66.192) ; 78.689,86.639 79.07,86.639 83.236,90.805 86.69,90.805 v2(89.383,88.113) 89.611,88.113 91.465,89.967 v8(91.465,92.253) ; v3@91.923,85.471 v3(91.948,85.496) ; v2(97.968,82.677) 107.518,82.677 108.687,81.509 v1(108.687,78.287) 110.19,78.287 111.811,79.908 111.811,92.735 110.134,94.412 v1(105.054,94.412) ; v3(98.577,91.491) 100.254,93.167 103.454,93.167 104.699,94.412 v1(105.054,94.412) ; v2(101.473,88.976) 102.718,88.976 105.054,91.313 v1(105.054,94.412) ; 121.387,120.345 121.285,120.244 121.285,118.313 127.229,112.37 v2(127.229,100.838) ; 129.007,120.345 129.007,112.395 v2(130.988,110.414) 142.494,110.414 144.348,108.56 v2(144.348,105.791) ; 129.362,96.317 130.277,96.317 132.486,98.527 132.486,100.33 134.137,101.981 v1(138.405,101.981) ; v1(129.743,99.441) 129.743,101.244 131.724,103.226 146.837,103.226 147.853,104.242 147.853,105.791 148.719,106.656 149.504,106.656 ; v2(144.45,101.981) 144.45,91.821 147.218,89.052 149.377,89.052 149.504,88.925 ; v2(146.329,104.597) 146.329,112.573 148.133,114.376 149.405,114.376 149.504,114.276 ; v2(146.456,100.711) 146.456,92.659 147.599,91.516 149.454,91.516 149.504,91.465 ; 175.336,118.872 175.336,104.648 v1(175.362,104.623) ; 198.298,118.415 198.196,118.313 198.196,116.383 204.14,110.439 v2(204.14,98.908) ; 205.918,118.415 205.918,110.465 v2(207.899,108.483) 219.405,108.483 221.259,106.629 v2(221.259,103.861) ; 206.273,94.386 207.188,94.386 209.398,96.596 209.398,98.4 211.049,100.051 v1(215.316,100.051) ; v1(206.654,97.511) 206.654,99.314 208.636,101.295 223.749,101.295 224.765,102.311 224.765,103.861 225.63,104.726 226.416,104.726 ; v2(221.361,100.051) 221.361,89.891 224.13,87.122 226.289,87.122 226.416,86.995 ; v2(223.241,102.667) 223.241,110.642 225.044,112.446 226.316,112.446 226.416,112.346 ; v2(223.368,98.781) 223.368,90.729 224.511,89.586 226.365,89.586 226.416,89.535
  Bottom Layer w0.635: v2(116.98,47.975) 121.298,47.975 v1(122.899,49.575) ; v1(125.933,91.241) 125.98,91.288 140.233,91.288 142.367,89.154 142.367,88.621 ; v2(193.46,46.578) 197.778,46.578 v1(199.378,48.178) ; v1(202.844,89.311) 202.891,89.357 217.145,89.357 219.278,87.224 219.278,86.69
  Bottom Layer w0.762: v1(38.43,60.736) 38.43,69.215 40.259,71.044 46.863,71.044 ; v1(38.71,88.824) v1@38.722,88.837 ; 46.152,81.686 45.872,81.686 v1@38.722,88.837 ; v1(46.177,93.421) 42.901,93.421 v1(38.557,97.765) 39.776,98.984 v7@46.203,98.984 ; 51.537,44.018 51.537,51.105 49.53,53.111 39.827,53.111 38.43,54.508 v6(38.43,54.936) 58.932,54.936 v1(59.563,54.305) ; v1(52.578,90.373) 55.474,90.373 56.972,91.872 56.972,95.377 v4@56.998,95.402 ; v1@52.578,90.424 52.527,90.373 40.259,90.373 v1@38.722,88.837 ; v1(58.75,51.105) 58.699,51.156 58.699,53.238 59.563,54.102 v1(59.563,54.305) ; v1(60.96,58.344) 60.96,58.09 59.563,56.693 v1(59.563,54.305) ; v1(61.189,51.105) 61.239,51.156 61.239,53.188 60.122,54.305 v1(59.563,54.305) ; v1(117.323,111.252) 117.17,111.404 117.17,121.742 118.999,123.571 141.122,123.571 142.951,121.742 ; 146.038,41.976 v1(146.673,41.341) ; v1(159.004,43.155) v1@159.017,43.167 ; v1(159.283,108.564) 159.283,117.043 161.112,118.872 167.716,118.872 ; 166.446,36.017 166.167,36.017 v1@159.017,43.167 ; v1(166.472,47.752) 163.195,47.752 v1(158.852,52.095) 160.071,53.315 v7@166.497,53.315 ; 172.39,91.846 172.39,97.739 169.24,100.889 160.528,100.889 159.283,102.133 v6(159.283,102.764) 179.786,102.764 v1(180.416,102.133) ; v1(172.872,44.704) 175.768,44.704 177.267,46.203 177.267,49.708 v4@177.292,49.733 ; v1@172.872,44.755 172.822,44.704 160.553,44.704 v1@159.017,43.167 ; v1(179.603,98.933) 179.553,98.984 179.553,101.067 180.416,101.93 v1(180.416,102.133) ; v1(181.813,106.172) 181.813,105.918 180.416,104.521 v1(180.416,102.133) ; v1(182.042,98.933) 182.093,98.984 182.093,101.016 180.975,102.133 v1(180.416,102.133) ; v1(194.234,109.322) 194.081,109.474 194.081,119.812 195.91,121.641 218.034,121.641 219.862,119.812 ; 222.517,40.579 v1(223.152,39.944)
  Bottom Layer w1.016: 39.091,45.284 39.137,45.284 40.818,46.965 40.818,51.181 v1(40.792,51.206) ; 159.944,93.112 159.99,93.112 161.671,94.793 161.671,99.009 v1(161.646,99.035)
  other v1: 227.166,39.974 150.686,41.371 204.153,42.108 127.674,43.505 221.222,51.684 225.438,51.785 177.927,53.01 144.743,53.081 148.959,53.182 49.809,57.912 53.111,57.963 95.047,73.279 90.119,76.098 97.358,94.691 102.895,94.767 213.843,97.942 57.633,98.679 88.773,99.187 94.31,99.187 136.931,99.873 215.087,103.632 138.176,105.562 170.663,105.74 173.965,105.791 86.716,108.89 92.431,109.068
  other v2: 173.355,54.559 175.641,54.559 171.196,56.998 171.171,59.284 173.736,61.824 173.736,64.084 169.596,66.396 169.647,68.682 53.061,100.228 55.347,100.228 50.902,102.667 50.876,104.953 53.442,107.493 53.442,109.753 49.301,112.065 49.352,114.351

## Polygon pours and split planes (outlines as drawn)
no net on Top Layer "Top Layer-No Net" (solid, remove dead copper, pour order 9): 192.241,70.962 194.146,72.867 194.4,72.867 227.166,72.867 229.071,70.962 229.071,30.322 227.166,28.417 226.912,28.417 194.146,28.417 192.241,30.322
no net on Top Layer "Top Layer-No Net" (none, remove dead copper, pour order 6): 196 vertices, not listed, extent 193.142,29.23 228.207,71.217
no net on Top Layer "Top Layer-No Net" (solid, remove dead copper, pour order 9): 115.761,72.359 117.666,74.264 117.92,74.264 150.686,74.264 152.591,72.359 152.591,31.719 150.686,29.814 150.432,29.814 117.666,29.814 115.761,31.719
no net on Top Layer "Top Layer-No Net" (none, remove dead copper, pour order 6): 196 vertices, not listed, extent 116.663,30.627 151.728,72.614
no net on Top Layer "Top Layer-No Net" (solid, remove dead copper, pour order 39): 70.282,39.446 70.282,76.276 32.182,76.276 32.182,39.395 32.233,39.446 47.93,39.446 47.93,39.573 cw(c49.073,39.573) 49.073,40.716 54.407,40.716 54.686,40.691 55.27,40.411 55.626,39.878 55.677,39.319 70.155,39.319
no net on Top Layer "Top Layer-No Net" (solid, remove dead copper, pour order 41): 118.237,124.917 118.313,124.993 149.784,124.993 152.324,122.453 152.324,78.003 149.784,75.463 118.034,75.463 115.494,78.003 115.494,122.453 118.034,124.993
no net on Top Layer "Top Layer-No Net" (solid, remove dead copper, pour order 26): 191.135,87.274 191.135,124.104 153.035,124.104 153.035,87.224 153.086,87.274 168.783,87.274 168.783,87.401 cw(c169.926,87.401) 169.926,88.544 175.26,88.544 175.539,88.519 176.124,88.24 176.479,87.706 176.53,87.147 191.008,87.147
no net on Top Layer "Top Layer-No Net" (solid, remove dead copper, pour order 40): 195.148,122.987 195.224,123.063 226.695,123.063 229.235,120.523 229.235,76.073 226.695,73.533 194.945,73.533 192.405,76.073 192.405,120.523 194.945,123.063
no net on Top Layer "Top Layer-No Net" (solid, remove dead copper, pour order 34): 111.942,55.438 114.071,57.567 114.071,122.149 111.531,124.689 74.701,124.689 72.161,122.149 72.161,57.719 74.442,55.438 86.802,55.438 87.681,56.317 98.021,56.317 98.042,56.338 98.942,55.438 111.942,55.438
no net on Top Layer "Top Layer-No Net" (solid, remove dead copper, pour order 29): 67.285,125.12 67.31,125.095 67.31,78.08 67.285,78.08 67.234,78.13 67.208,78.156 34.9,78.156 34.874,78.181 34.874,125.12
no net on Top Layer "Top Layer-No Net" (solid, remove dead copper, pour order 28): 187.579,79.451 187.604,79.426 187.604,32.41 187.579,32.41 187.528,32.461 187.503,32.487 155.194,32.487 155.169,32.512 155.169,79.451
no net on Bottom Layer "Top Layer-No Net" (solid, remove dead copper, pour order 5): 192.241,70.962 194.146,72.867 227.166,72.867 229.071,70.962 229.071,30.322 227.166,28.417 194.146,28.417 192.241,30.322
no net on Bottom Layer "Top Layer-No Net" (solid, remove dead copper, pour order 5): 115.761,72.359 117.666,74.264 150.686,74.264 152.591,72.359 152.591,31.719 150.686,29.814 117.666,29.814 115.761,31.719
no net on Bottom Layer "Top Layer-No Net" (solid, remove dead copper, pour order 42): 70.282,39.446 70.282,76.276 32.182,76.276 32.182,39.395 47.93,39.446 47.93,39.573 cw(c49.073,39.573) 49.073,40.716 54.407,40.716 55.27,40.462 55.651,39.827 55.677,39.319 70.155,39.319
no net on Bottom Layer "Top Layer-No Net" (solid, remove dead copper, pour order 38): 118.034,124.993 115.494,122.453 115.494,78.003 118.034,75.463 149.784,75.463 152.324,78.003 152.324,122.453 149.784,124.993 118.034,124.993
no net on Bottom Layer "Top Layer-No Net" (solid, remove dead copper, pour order 23): 153.035,124.104 191.135,124.104 191.135,87.274 191.008,87.147 176.53,87.147 176.53,87.274 ccw(c175.26,87.274) 175.26,88.544 169.926,88.544 169.113,88.29 168.783,87.401 168.783,87.274 153.035,87.3 153.035,124.104
no net on Bottom Layer "Top Layer-No Net" (solid, remove dead copper, pour order 37): 194.945,123.063 192.405,120.523 192.405,76.073 194.945,73.533 226.695,73.533 229.235,76.073 229.235,120.523 226.695,123.063 194.945,123.063
no net on Bottom Layer "Top Layer-No Net" (solid, remove dead copper, pour order 27): 114.071,57.567 113.991,57.567 111.862,55.438 98.942,55.438 98.882,55.498 98.042,56.338 87.702,56.338 87.641,56.338 86.741,55.438 74.442,55.438 72.161,57.719 72.161,122.149 72.314,122.301 74.701,124.689 74.803,124.587 74.905,124.587 111.633,124.587 114.071,122.149 114.071,57.567
no net on Bottom Layer "Top Layer-No Net" (solid, remove dead copper, pour order 25): 67.285,125.12 34.9,125.12 34.874,125.095 34.874,78.13 67.285,78.13 67.285,125.12
no net on Bottom Layer "Top Layer-No Net" (solid, remove dead copper, pour order 24): 187.579,79.451 155.194,79.451 155.169,79.426 155.169,32.461 187.579,32.461 187.579,79.451
no net on Keep-Out Layer "Top Layer-No Net" (none, remove dead copper): 118.034,75.463 115.494,78.003 115.494,122.453 118.034,124.993 149.784,124.993 152.324,122.453 152.324,78.003 149.784,75.463
no net on Keep-Out Layer "Top Layer-No Net" (none, remove dead copper): 194.945,73.533 192.405,76.073 192.405,120.523 194.945,123.063 226.695,123.063 229.235,120.523 229.235,76.073 226.695,73.533

## Keep-outs
Keep-Out Layer:
  lines w0.1: 30,126 134,126 ; 67.234,125.134 34.889,125.134 34.889,78.13 67.285,78.13 ; 67.274,78.195 67.274,125.185 ; 187.528,79.465 155.183,79.465 155.183,32.461 187.579,32.461 ; 187.568,32.526 187.568,79.516
  lines w0.254: 25.098,30.1 25.603,28.575 ; 25.295,124.334 25.806,125.857 ; 25.349,28.576 25.857,28.574 ; 25.552,125.858 26.06,125.856 ; 25.688,69.192 25.603,28.575 ; 25.722,85.24 25.806,125.857 ; 26.114,30.098 25.603,28.575 ; 26.311,124.332 25.806,125.857 ; 31.369,125.857 230.657,125.857 230.657,28.215 31.569,27.44 31.744,27.58 ; 31.471,125.984 31.445,126.009 31.445,27.788 40.121,27.788 ; 47.93,39.446 32.436,39.446 32.182,39.472 32.182,76.276 70.282,76.276 70.282,39.446 cw(c70.155,39.446) 70.155,39.319 55.677,39.319 55.677,39.446 ccw(c54.407,39.446) 54.407,40.716 53.137,40.716 49.454,40.716 49.073,40.716 ccw(c49.073,39.573) 47.93,39.573 ; 168.783,87.274 153.289,87.274 153.035,87.3 153.035,124.104 191.135,124.104 191.135,87.274 cw(c191.008,87.274) 191.008,87.147 176.53,87.147 176.53,87.274 ccw(c175.26,87.274) 175.26,88.544 173.99,88.544 170.307,88.544 169.926,88.544 ccw(c169.926,87.401) 168.783,87.401 ; 72.161,57.719 72.161,59.919 72.161,122.149 74.701,124.689 84.861,124.689 111.531,124.689 114.071,122.149 114.071,59.919 114.071,57.567 111.942,55.438 98.942,55.438 98.042,56.338 87.702,56.338 86.802,55.438 74.442,55.438 72.161,57.719 ; 115.494,78.003 118.034,75.463 119.304,75.463 149.784,75.463 152.324,78.003 152.324,122.453 149.784,124.993 118.034,124.993 115.494,122.453 115.494,78.003 ; 115.761,31.719 117.666,29.814 149.416,29.814 150.051,29.814 150.686,29.814 152.591,31.719 152.591,72.359 150.686,74.264 117.666,74.264 115.761,72.359 115.761,31.719 ; 192.241,30.322 194.146,28.417 225.896,28.417 226.531,28.417 227.166,28.417 229.071,30.322 229.071,70.962 227.166,72.867 194.146,72.867 192.241,70.962 192.241,30.322 ; 192.405,76.073 194.945,73.533 196.215,73.533 226.695,73.533 229.235,76.073 229.235,120.523 226.695,123.063 194.945,123.063 192.405,120.523 192.405,76.073
  text "97.282 (mm)" at 26.603,69.444 h1.52 r89.88

## Other copper
Top Layer:
  text "200.559 (mm)" at 121.646,127.246 h1.52 r0.14
  text "LAB411-RF315" at 76.302,103.2 h1.52 r90
  text "LAB411-RF315" at 74.93,101.6 h1.52 r90
  text "LAB411-RF315" at 76.505,101.575 h1.52 r90